# Altium PCB Main_PCB.PcbDoc
Units mm, origin at the board's own origin, x right, y up, seen from the top; angles counter-clockwise.
Board outline 60.07 x 70.36 mm, 2 copper layers (Top Layer, Bottom Layer); 21 components, 29 nets, 94 pads, 8 vias.
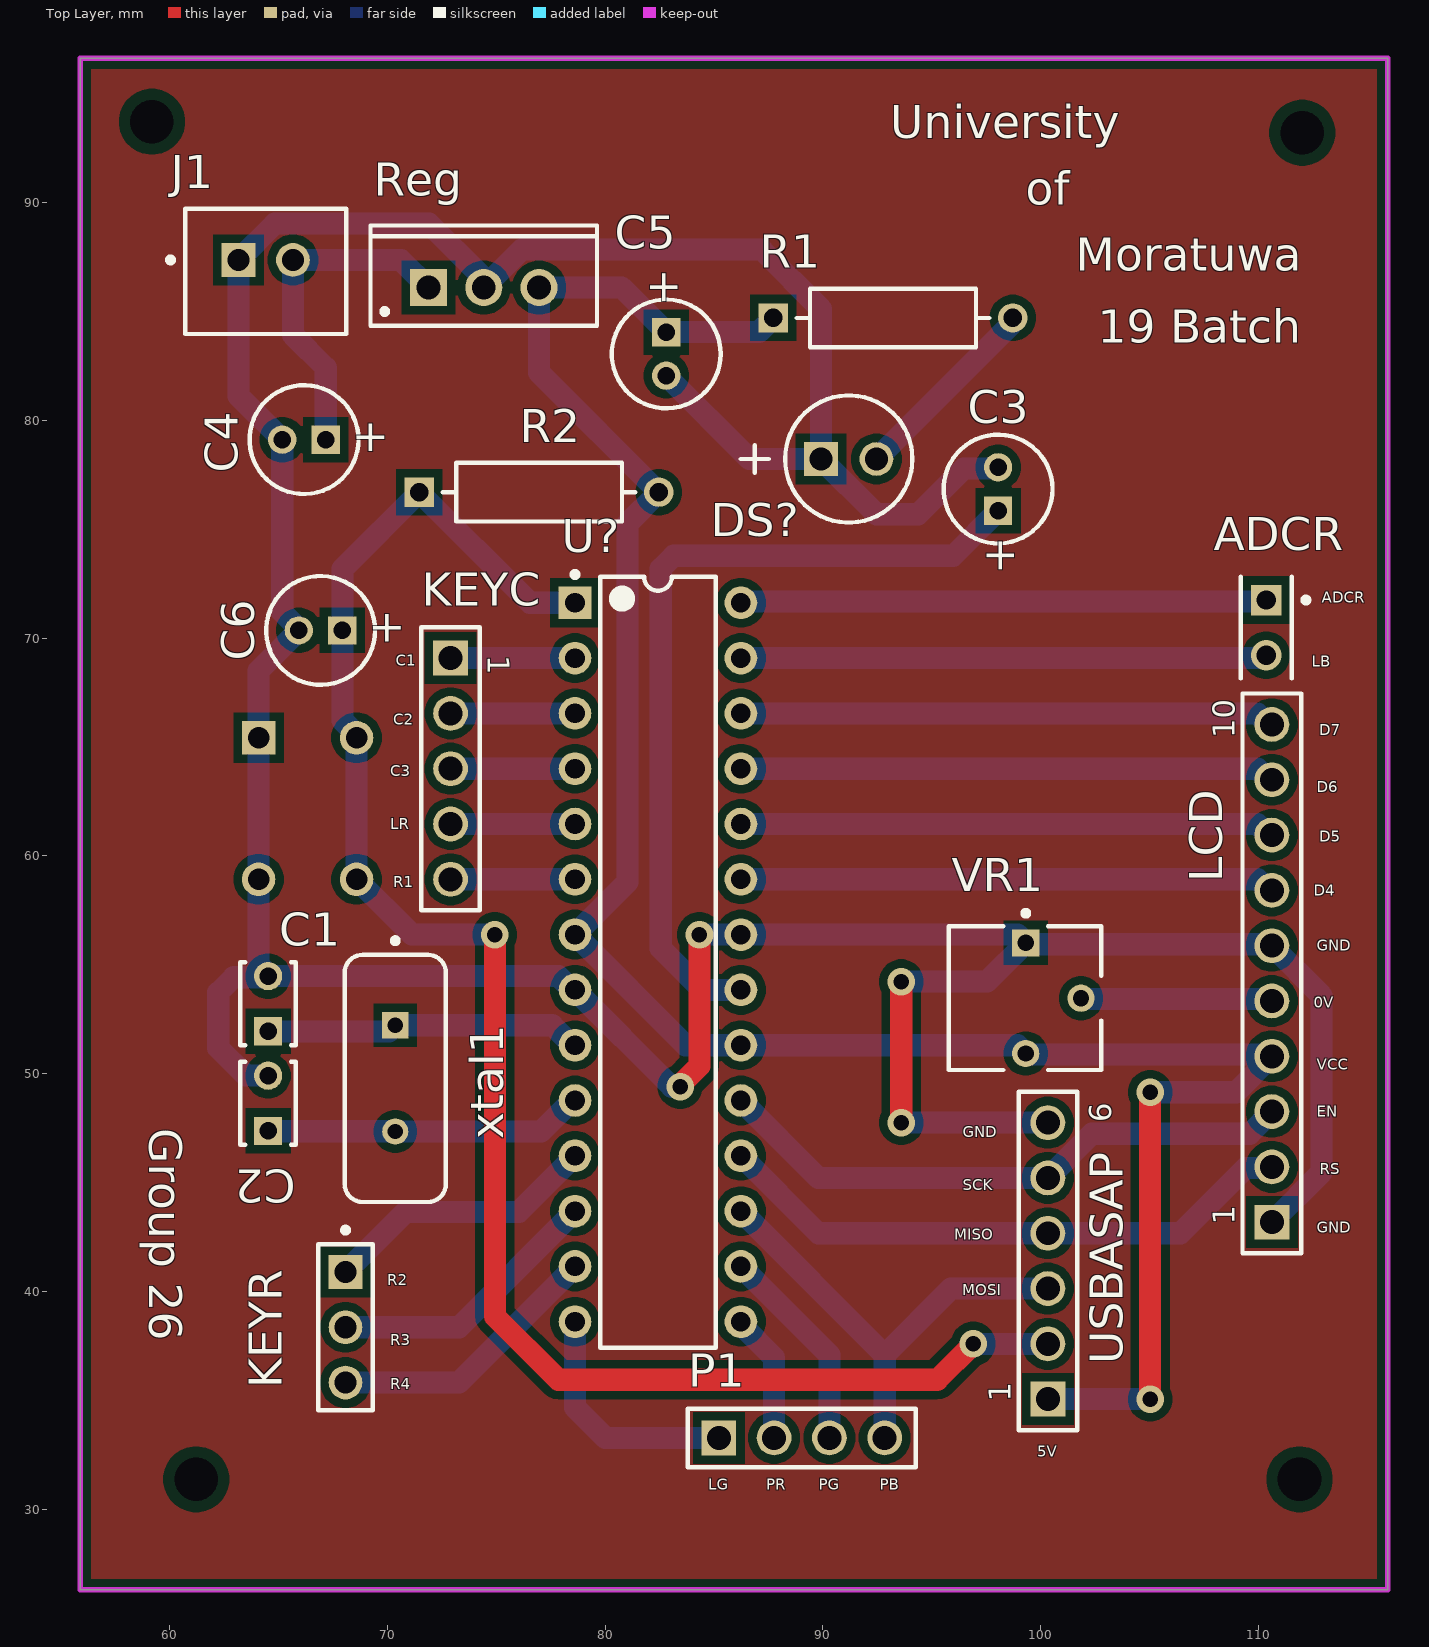
[diagram p0: Top Layer view]
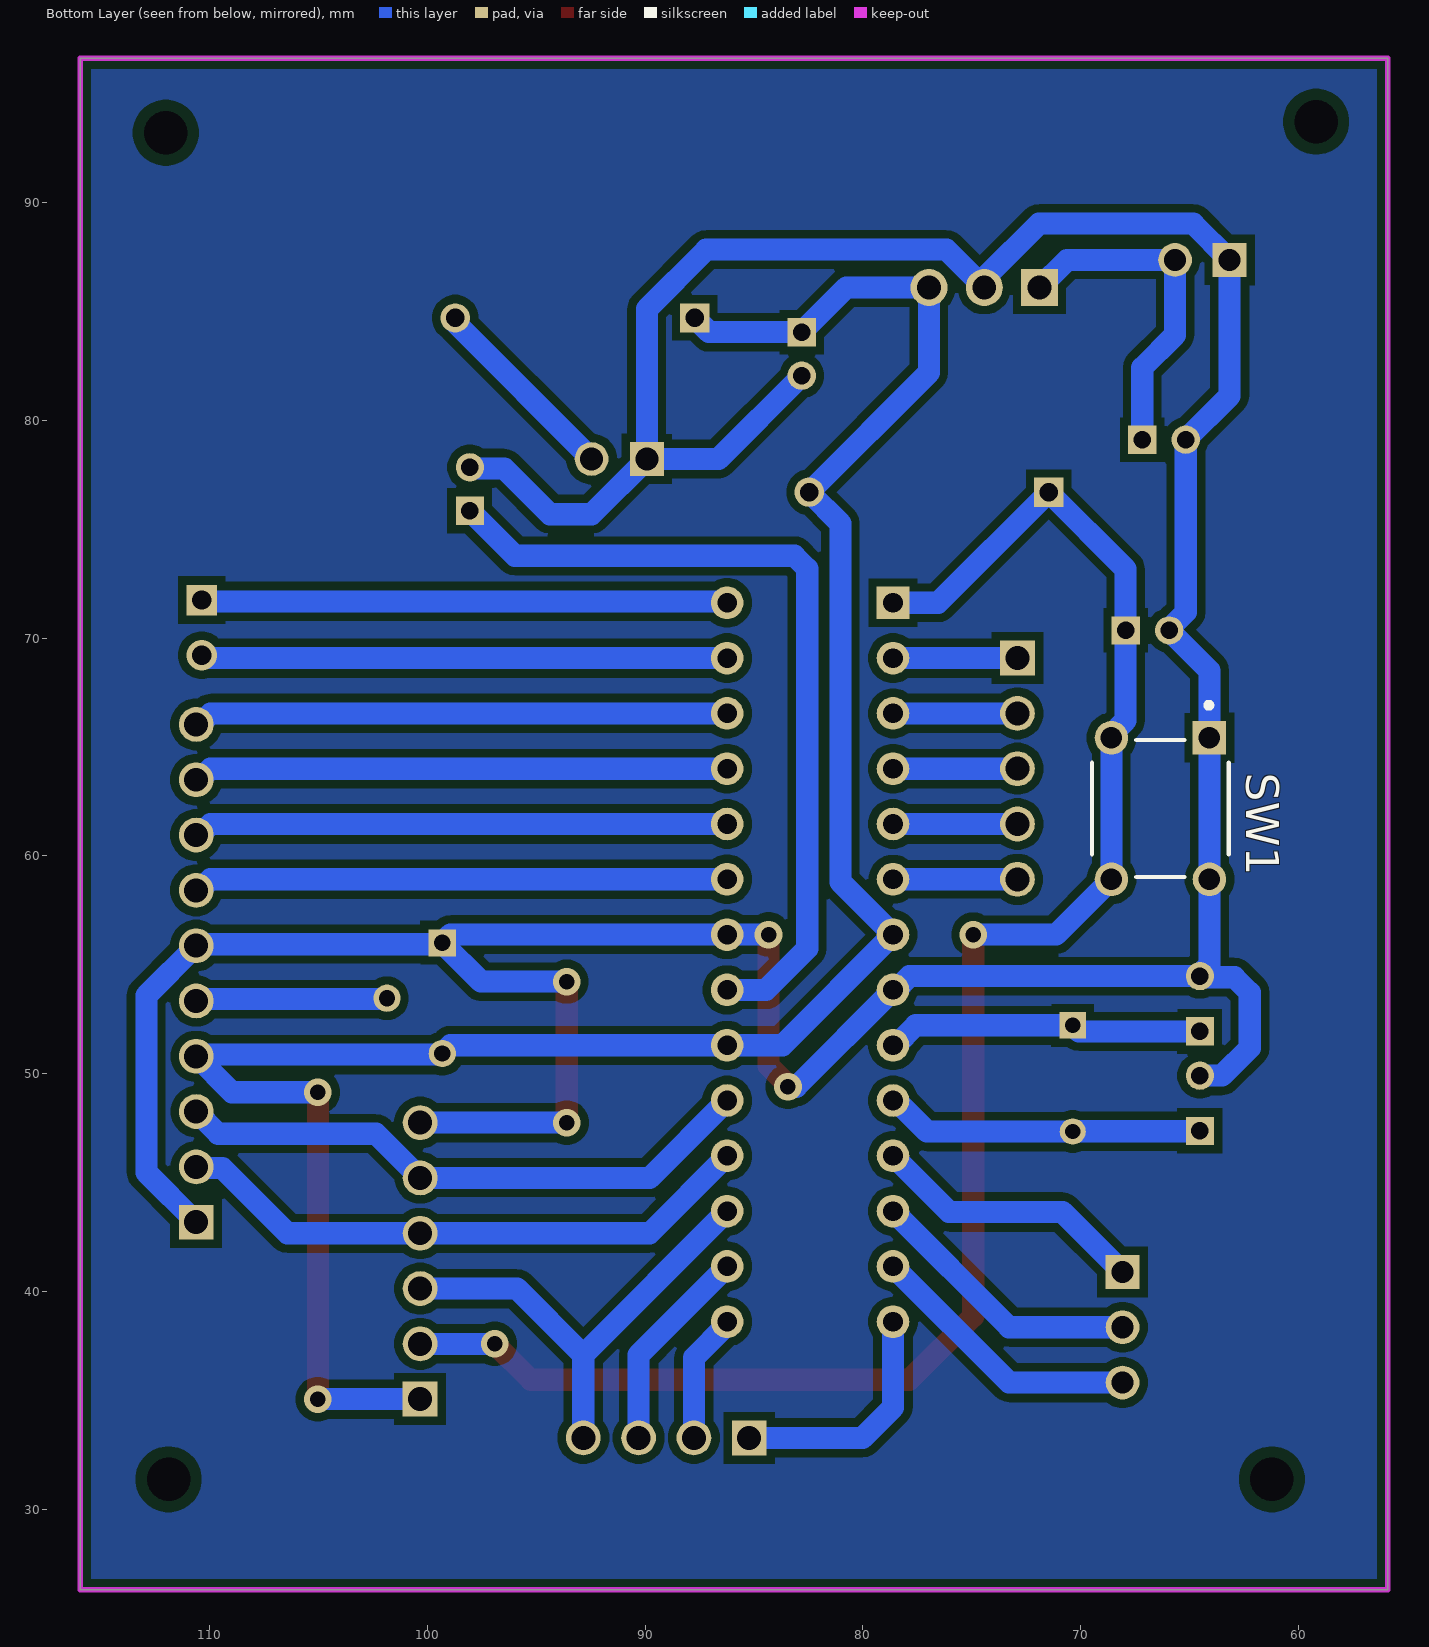
[diagram p1: Bottom Layer view, seen from below]

## Layer stack, top to bottom
Top Solder: solder mask 0.0102, Solder Resist, Dk 3.5
Top Layer: signal copper 0.0356
Dielectric 1: dielectric 0.32, FR-4, Dk 4.8
Bottom Layer: signal copper 0.0356
Bottom Solder: solder mask 0.0102, Solder Resist, Dk 3.5

## Board outline
55.88,26.289 115.951,26.289 115.951,96.647 55.88,96.647

## Design rules (kind name [scope] priority, off if disabled: settings)
Clearance [All] p1: gap=0.381 ignorepadtopadclearanceinfootprint=FALSE except(0.508: Arc-Hole Track-Hole SMDPad-Hole THPad-Hole Via-Hole Fill-Hole Poly-Hole Region-Hole Text-Hole)
PolygonConnect [All] p1: connectstyle=Relief reliefconductorwidth=0.254 reliefentries=4 polygonreliefangle="90 Angle" airgapwidth=0.254
RoutingVias [All] p1: holewidth=0.711 width=1.27 viastyle="Through Hole" minholewidth=0.711 minwidth=1.27 maxholewidth=0.711 maxwidth=1.27
SolderMaskExpansion [All] p1: expansion=0.102 istentingtop=FALSE
Width 1width1 [All] p1: maxlimit=1.016 minlimit=1.016 preferedwidth=1.016
30 further rules are at their usual default settings.

## Components (designator, comment, footprint, x,y, rotation, side; value= is the part's Value field where it differs from the comment)
ADCR "5-146280-2" TECO-5-146280-2_V 110.363,70.485 r270 top
C1 "22pF" KEMT-C315-THT-2 64.516,53.213 r90 top
C2 "22pF" KEMT-C315-THT-2 64.516,48.641 r90 top
C3 "100nF" CAPPR55-200-1100X500X1200 98.044,76.851 r90 top
C4 "330nF" CAPPR55-200-1100X500X1200 66.167,79.121 r180 top
C5 "100nF" CAPPR55-200-1100X500X1200 82.804,83.058 r270 top
C6 "100nF" CAPPR55-200-1100X500X1200 66.929,70.358 r180 top
DS? "HLMP-3301" AVAG-HLMP-3301-2 89.916,78.232 r0 top
J1 "power" FP-B2B-XH-A_LF_SN-MFG 64.409,86.851 r0 top
KEYC "61300511121" 61300511121 72.898,64.008 r270 top
KEYR "22-28-4033" MOLX-22-28-4033_V 68.072,38.354 r270 top
LCD "61301011121" 61301011121 110.617,54.61 r90 top
P1 "61300411121" 61300411121 89.027,33.274 r0 top
R1 "1 k" FP-RNC55-MFG 93.218,84.709 r0 top value=1kΩ
R2 "RNC55H1002FSB14" FP-RNC55-MFG 76.962,76.708 r0 top value=10kΩ
Reg "" TO220 74.422,86.106 r0 top
SW1 "" FP-3-1825910-1-MFG 66.33,62.178 r270 bottom
U? "ATmega328-PU" 28P3 82.423,55.118 r0 top
USBASAP "61300611121" 61300611121 100.33,41.402 r90 top
VR1 "3362P-1-103LF" BOUR-3362P 99.279,53.467 r270 top
xtal1 "FOXSLF/160-20" FOX-FOXSLF160-20 70.358,49.784 r270 top

## Footprints (in the part's own frame and the unit in brackets; to place one, negate y for a bottom-side part, rotate by r counter-clockwise, add the part's x,y. Pads: shape width x height; smd on the part's side, far side on the other; paste and mask are expansions set on the pad)
28P3 [mm] "28-Pin Plastic Dual In-Line Package (PDIP)"
  rect 1.5x1.5 hole 0.9: 1(-3.81,16.51)
  round 1.5 hole 0.9: 2(-3.81,13.97) 3(-3.81,11.43) 4(-3.81,8.89) 5(-3.81,6.35) 6(-3.81,3.81) 7(-3.81,1.27) 8(-3.81,-1.27) 9(-3.81,-3.81) 10(-3.81,-6.35) 11(-3.81,-8.89) 12(-3.81,-11.43) 13(-3.81,-13.97) 14(-3.81,-16.51) 15(3.81,-16.51) 16(3.81,-13.97) 17(3.81,-11.43) 18(3.81,-8.89) 19(3.81,-6.35) 20(3.81,-3.81) 21(3.81,-1.27) 22(3.81,1.27) 23(3.81,3.81) 24(3.81,6.35) 25(3.81,8.89) 26(3.81,11.43) 27(3.81,13.97) 28(3.81,16.51)
  silkscreen extent -3.93,-17.7 2.65,17.93, body extent -3.6,-17.65 3.6,17.65, height 4.58
61300411121 [mm] "Pin Header, pitch 2.54 mm, THT, Vertical, single row, 4p"
  rect 1.6x1.6 hole 1.1: 1(-3.81,0)
  round 1.6 hole 1.1: 2(-1.27,0) 3(1.27,0) 4(3.81,0)
  silkscreen extent -5.23,-1.35 5.23,1.35, body extent -5.08,-1.27 5.08,1.27, height 8.57
61300511121 [mm] "Pin Header, pitch 2.54 mm, THT, Vertical, single row, 5p"
  rect 1.6x1.6 hole 1.1: 1(-5.08,0)
  round 1.6 hole 1.1: 2(-2.54,0) 3(0,0) 4(2.54,0) 5(5.08,0)
  silkscreen extent -6.5,-1.35 6.5,1.35, body extent -6.35,-1.27 6.35,1.27, height 8.57
61300611121 [mm] "Pin Header, pitch 2.54 mm, THT, Vertical, single row, 6p"
  rect 1.6x1.6 hole 1.1: 1(-6.35,0)
  round 1.6 hole 1.1: 2(-3.81,0) 3(-1.27,0) 4(1.27,0) 5(3.81,0) 6(6.35,0)
  silkscreen extent -7.77,-1.35 7.77,1.35, body extent -7.62,-1.27 7.62,1.27, height 8.57
61301011121 [mm] "Pin Header, pitch 2.54 mm, THT, Vertical, single row, 10p"
  rect 1.6x1.6 hole 1.1: 1(-11.43,0)
  round 1.6 hole 1.1: 2(-8.89,0) 3(-6.35,0) 4(-3.81,0) 5(-1.27,0) 6(1.27,0) 7(3.81,0) 8(6.35,0) 9(8.89,0) 10(11.43,0)
  silkscreen extent -12.85,-1.35 12.85,1.35, body extent -12.7,-1.27 12.7,1.27, height 8.57
AVAG-HLMP-3301-2 [mm] "THD, 2-Leads, Body Dia 5.85mm"
  rect 1.55x1.55 hole 1.05: 1(0,0)
  round 1.55 hole 1.05: 2(2.54,0)
  silkscreen extent -3.68,-2.92 4.19,2.92
BOUR-3362P [mm] "THD, 3-Leads, Body 6.6x6.99mm, Pitch 2.54mm"
  rect 1.25x1.25 hole 0.75: 1(-2.54,0.035)
  round 1.25 hole 0.75: 2(0,2.575) 3(2.54,0.035)
  silkscreen extent -4.02,-3.49 3.3,3.5, body extent -3.3,-3.49 3.3,3.49, height 4.95
CAPPR55-200-1100X500X1200 [mm] "THD, 2-Leads, Dia 5mm, Body Length 11mm"
  rect 1.3x1.3 hole 0.8: 1(-1,0)
  round 1.3 hole 0.8: 2(1,0)
  silkscreen extent -2.5,-2.5 2.5,2.5, body extent -2.5,-2.5 2.5,2.5, height 12
FOX-FOXSLF160-20 [mm] "THD, 2-Leads, Body 11.35x4.65mm"
  rect 1.2x1.2 hole 0.7: 1(-2.44,0)
  round 1.2 hole 0.7: 2(2.44,0)
  silkscreen extent -6.45,-2.32 5.68,2.32, body extent -5.67,-2.32 5.68,2.33, height 3.6
FP-3-1825910-1-MFG [mm]
  rect 1.54x1.54 hole 0.99 paste-1000 mask+0: 1(-3.25,2.25)
  round 1.54 hole 0.99 paste-1000 mask+0: 2(3.25,2.25) 3(-3.25,-2.25) 4(3.25,-2.25)
  silkscreen extent -4.87,-3.15 3.15,3.15, body extent -3.9,-3 3.9,3, height 17.3
FP-B2B-XH-A_LF_SN-MFG [mm]
  rect 1.55x1.55 hole 1 paste-1000 mask+0: 1(-1.25,0.525)
  round 1.55 hole 1 paste-1000 mask+0: 2(1.25,0.525)
  silkscreen extent -4.5,-2.88 3.7,2.88, body extent -3.8,-2.98 3.8,2.98, height 0.25
FP-RNC55-MFG [mm]
  rect 1.35x1.35 hole 0.85 paste-1000 mask+0: 1(-5.5,0)
  round 1.35 hole 0.85 paste-1000 mask+0: 2(5.5,0)
  silkscreen extent -4.43,-1.35 4.43,1.35, body extent -6.27,-1.45 6.27,1.45, height 0.25
KEMT-C315-THT-2 [mm] "THD, 2-Leads, Body 3.81x2.54mm"
  rect 1.3x1.3 hole 0.8: 1(-1.27,0)
  round 1.3 hole 0.8: 2(1.27,0)
  silkscreen extent -1.91,-1.27 1.91,1.27, body extent -1.91,-1.27 1.91,1.27, height 4.66
MOLX-22-28-4033_V [mm] "THD, 3-Leads, Body 7.62x2.49mm, Pitch 2.54mm"
  rect 1.55x1.55 hole 1.02: 1(-2.54,0)
  round 1.55 hole 1.02: 2(0,0) 3(2.54,0)
  silkscreen extent -4.58,-1.24 3.81,1.24, body extent -3.81,-1.24 3.81,1.24, height 8.38
TECO-5-146280-2_V [mm] "Connector, 2-Leads, Body 4.67x2.34mm, Pitch 2.54mm"
  rect 1.4x1.4 hole 0.89: 1(-1.27,0)
  round 1.4 hole 0.89: 2(1.27,0)
  silkscreen extent -2.33,-1.17 2.33,1.94, body extent -2.34,-1.17 2.34,1.17, height 5.33
TO220 [mm] "TO, Thru-Hole, Vertical, Heatsink Mounted; 3 In-Line Leads; Pitch 2.54 mm"
  rect 1.7x1.7 hole 1.1: 1(-2.54,0)
  round 1.7 hole 1.1: 2(0,0) 3(2.54,0)
  silkscreen extent -5.2,-1.75 5.2,2.85, body extent -5.25,-1.8 5.25,2.9, height 19.7

## Part data
ADCR: library part CMP-2000-07492-1, "Male Header, Pitch 2.54 mm, 1 x 2 Position, Height 8.21 mm, Tail Length 3.05 mm, -65 to 105 degC, RoHS, Bulk", Case\/Package=100, Colour=Black, Current Rating=3A, Flammability Rating=UL94V-0, High Temperature Housing=Yes, Manufacturer="TE Connectivity", Max Current Rating=5A, Max Operating Temperature=105degC, Min Operating Temperature=-65degC, Package Description="Male Header, Pitch 2.54 mm, 1 x 2 Position, Height 8.21 mm, Tail Length 3.05 mm", Package Quantity=500, Approvals=CSA, Board Standoff=No(Without), Connector Type=Header, Contact Gender=Male, Contact Material=CopperAlloy, Contact Mating Length=0.23inch, Contact Plating=Matte, Contact Protection=No(Without), Contact Shape=Square, Datasheet URL=http://www.te.com/commerce/DocumentDelivery/DDEController?Action=showdoc&DocId=Customer+Drawing%7F146280%7FH1%7Fpdf%7FEnglish%7FENG_CD_146280_H1.pdf%7F5-146280-2, Datasheet Version="Rev. H1, 08/2016", Depth=2.34mm, Gasket=No(Without), High Speed Serial Data Connector=No, Housing Colour=Black, Housing Material=Polymer, Keyed=No, Length=4.67mm, Manufacturer URL=http://www.te.com/, Mating Alignment=No(Without), Mating Connector Lock=No(Without), Mating Post Length=0.23inch, Mount=ThroughHole, Mounting Technology=ThroughHole, Number of Contacts=2, Number of Positions=2, Number of Rows=1, Orientation=Straight, Package Reference=5-146280-2, Packaging=Carton, Panel Mount Retention=No(Without), PCB Mount Retention=Without, PCB Mounting Orientation=Vertical, PCB Thickness=0.063inch, Pitch=2.54mm, Radiation Hardening=No, RoHSCompliant=true, Row Spacing=2.54mm, Selectively Loaded=No(Without), Stabilizers=No(Without), Termination=ThroughHole, Termination Post Length=0.12inch
C1 C2: library part CMP-1664-00008-1, "Capacitor, Ceramic, 22 pF, +/-10 %, 100 V, -55 to 125 degC, 2-Pin THD, RoHS, Bulk", Case\Package=TO-220, Max Input Voltage="40 V", Max Operating Temperature="125 degC", Max Ouput Current="1.5 A", Min Input Voltage="4.2 V", Min Operating Temperature="0 degC", Output Voltage="1.2 V", Package Quantity=50, ComponentLink1Description="Manufacturer URL", ComponentLink1URL=http://www.kemet.com/, ComponentLink2Description=Datasheet, ComponentLink2URL=http://capacitoredge.kemet.com/capedge2/DataSheet/Datasheet-C315C220K1G5TA.pdf?pn=C315C220K1G5TA{BULK}, DatasheetVersion=Aug-16, Height="9.28 mm", Length="10.28 mm", Mount="Through Hole", Output Current="1.5 A", Outputs=1, PackageDescription="2-Pin Through Hole Device, Body 3.81 x 2.54 mm", PackageReference=C315-THT-2, Packaging=Rail/Tube, Pins=3, Radiation Hardening=No, REACH SVHC="No SVHC", RoHSCompliant=true, Weight="0.08113 oz", Width="4.82 mm"
C3 C4 C5 C6: library part CMP-1665-00039-1, "Aluminum Electrolytic Capacitor, 1 uF, +/- 20%, 50 V, -55 to 105 degC, 2-Pin THD, RoHS, Bulk", Max Operating Temperature="70 degC", Min Operating Temperature="-30 degC", Package Quantity=150, Channels=2, ComponentLink1Description="Manufacturer URL", ComponentLink1URL=http://www.panasonic.com/, ComponentLink2Description=Datasheet, ComponentLink2URL=https://datasheet.ciiva.com/7275/94060-7275472.pdf, DatasheetVersion=Mar-05, Mount="Through Hole", PackageDescription="2-Pin Radial Lead, Dia 5 mm, Body Length 11 mm", PackageReference=CAPPR55-200-1100X500X1200, Packaging=Bulk, Radiation Hardening=No, RoHSCompliant=true
DS?: library part CMP-2000-06411-1, "T-1 3/4 (5 mm) Diffused LED Lamp, 1.9 V, -40 to 100 degC, 2-Pin THD, RoHS, Bulk", Emitting Color=Red, Forward Current=25mA, Forward Voltage=2.4V, Manufacturer=Avago, Operating Temp Range=-40Cto100C, Operating Temperature Classification=Industrial, Package Description="2-Pin Through Hole LED, Dia 5.85 mm", Package Type=T-13/4, Power Dissipation=85W, Reverse Voltage=5V, Test Current (It)=10mA, Chip Material=GaP, Datasheet URL=http://www.avagotech.com/docs/AV02-1558EN, Datasheet Version=03/2015, DELETED=Compliant, Dominant Wave Length=626nm, High Brightness=No, Lens Dimensions=5.08x5.08x8.3mm, Lens Type=ColoredDiffused, Lum Intensity=5.4mcd, Luminous Intensity=5.4mcd, Main Category=StandardLED, Manufacturer URL=http://www.avagotech.com/, Mounting=ThroughHole, Mounting Technology=ThroughHole, Number of  Elements=1, Package Reference=HLMP-3301, Packaging=TapeandReel, Peak Wavelength=635nm, Pin Count=2, Product Depth (mm)=6.1mm, Product Height (mm)=9.19mm, Product Length (mm)=6.1mm, Rad Hardened=No, Shape Type=Circular, Type=Uni-Color, Viewing Angle=60deg
J1: library part CMP-2000-05888-3, "CONN HEADER VERT 2POS 2.5MM", Color=Natural, Contact Resistance=20mR, Current Rating=3A, Housing Color=White, Insulation Resistance=1GR, Max Operating Temperature=85°C, Max Voltage Rating (AC)=250V, Min Operating Temperature=-25°C, Connector Type="Male Pin", Contact Material=Brass, Contact Plating=Tin, Contact Type="Male Pin", Depth=5.75mm, Fastening Type=Detent, Housing Material=Polyamide, Lead Free="Lead Free", Lead Pitch=2.5mm, Length=7.4mm, Max Current Rating=3A, Max Voltage Rating (DC)=250V, Mount="Through Hole", Number of Contacts=2, Number of Positions=2, Number of Rows=1, Orientation=Straight, Packaging=Bulk, Pitch=2.5mm, REACH SVHC="No SVHC", Series=XH, Termination=Solder, Voltage Rating=250V, Voltage Rating (AC)=250V, Wire/Cable Gauge=22AWG
KEYC: library part CMP-1502-01068-1, "THT Vertical Pin Header WR-PHD, Pitch 2.54 mm, Single Row, 5 pins", Contact Resistance=20mOhm, Manufacturer="Wurth Elektronik", Operating Temperature=-40to105degC, Rated Current=3A, Withstanding Voltage=500VAC, Working Voltage=250VAC, Datasheet URL=https://katalog.we-online.de/em/datasheet/6130xx11121.pdf, Gender=Male, Manufacturer URL=http://www.we-online.de, Mounting Technology=THT, Orientation=Vertical, Package Reference=61300511121, Packaging=Bag, Part Number=61300511121, Pin Number=5, Pitch=2.54mm, Publisher=WurthElektronik, Row Number=Single
KEYR: library part CMP-1676-00001-5, "Male Header, Pitch 2.54 mm, 1 x 3 Position, Height 8.38 mm, Tail Length 3.18 mm, RoHS, Bulk", Colour=Black, Current Rating="4 A", Manufacturer=Molex, Max Operating Temperature="75 degC", Min Operating Temperature="0 degC", Package Quantity=1, Voltage Rating="250 V", ComponentLink1Description="Manufacturer URL", ComponentLink1URL=http://www.molex.com/, ComponentLink2Description=Datasheet, ComponentLink2URL=http://www.molex.com/pdm_docs/sd/022284033_sd.pdf, Contact Finish=Gold, Contact Material=Brass, Contact Plating=Gold, DatasheetVersion="Rev. G, 01/2012", Height="8.38 mm", Lead Pitch="0.1 inch", Length="7.62 mm", Mount="Through Hole", Mounting Technology="Through Hole", PackageDescription="Male Header, Pitch 2.54 mm, 1 x 3 Position, Height 8.38 mm, Tail Length 3.18 mm", PackageReference=22-28-4033, Packaging=Bulk, Pins=3, REACH SVHC=Unknown, RoHSCompliant=true, Rows=1
LCD: library part CMP-1502-01082-1, "THT Vertical Pin Header WR-PHD, Pitch 2.54 mm, Single Row, 10 pins", Contact Resistance=20mOhm, Manufacturer="Wurth Elektronik", Operating Temperature=-40to105degC, Rated Current=3A, Withstanding Voltage=500VAC, Working Voltage=250VAC, Datasheet URL=https://katalog.we-online.de/em/datasheet/6130xx11121.pdf, Gender=Male, Manufacturer URL=http://www.we-online.de, Mounting Technology=THT, Orientation=Vertical, Package Reference=61301011121, Packaging=Bag, Part Number=61301011121, Pin Number=10, Pitch=2.54mm, Publisher=WurthElektronik, Row Number=Single
P1: library part CMP-1502-01064-1, "THT Vertical Pin Header WR-PHD, Pitch 2.54 mm, Single Row, 4 pins", Contact Resistance=20mOhm, Manufacturer="Wurth Elektronik", Operating Temperature=-40to105degC, Rated Current=3A, Withstanding Voltage=500VAC, Working Voltage=250VAC, Datasheet URL=https://katalog.we-online.de/em/datasheet/6130xx11121.pdf, Gender=Male, Manufacturer URL=http://www.we-online.de, Mounting Technology=THT, Orientation=Vertical, Package Reference=61300411121, Packaging=Bag, Part Number=61300411121, Pin Number=4, Pitch=2.54mm, Publisher=WurthElektronik, Row Number=Single
R1: library part CMP-02408-000004-1, "RES 10K OHM 1/8W 1% AXIAL", Manufacturer=Vishay, Manufacturer Part Number=RNC55H1002FSB14, Package=RNC55, Power Rating=0.125W, Resistance=1kΩ, Temperature="-65°C to +175°C", Temperature Coefficient=50ppm/°C, Temperature Range High=+175°C, Temperature Range Low=-65°C, Tolerance=1%, Voltage Rating=200V, Automotive=No, Category=Res, ComponentLink2Description=Datasheet, ComponentLink2URL=https://www.vishay.com/docs/31025/erc.pdf, Composition="Metal Film", Device Class L1="Passive Components", Device Class L2=Resistors, Device Class L3="Through-Hole Resistors", Digikey Description="RES 10K OHM 1/8W 1% AXIAL", Failure Rate=0.001%, Height=2.69mm, Ipc Land Pattern Name=RESAD1100W85L762D269, Lead Free=No, Military Standard=true, Octopart=https://octopart.com/rnc55h1002fs-vishay-40848808, RoHS=FALSE, Series=RNC
R2: library part CMP-02408-000004-1, "RES 10K OHM 1/8W 1% AXIAL", Manufacturer=Vishay, Package=RNC55, Power Rating=0.125W, Resistance=10kΩ, Temperature="-65°C to +175°C", Temperature Coefficient=50ppm/°C, Temperature Range High=+175°C, Temperature Range Low=-65°C, Tolerance=1%, Voltage Rating=200V, Automotive=No, Category=Res, ComponentLink2Description=Datasheet, ComponentLink2URL=https://www.vishay.com/docs/31025/erc.pdf, Composition="Metal Film", Device Class L1="Passive Components", Device Class L2=Resistors, Device Class L3="Through-Hole Resistors", Digikey Description="RES 10K OHM 1/8W 1% AXIAL", Failure Rate=0.001%, Height=2.69mm, Ipc Land Pattern Name=RESAD1100W85L762D269, Lead Free=No, Manufacturer Part Number=RNC55H1002FSB14, Military Standard=true, Octopart=https://octopart.com/rnc55h1002fs-vishay-40848808, RoHS=FALSE, Series=RNC
Reg: library part CMP-0244-00483-1, "Positive Voltage Regulator, 5V, 3-Pin TO-220", ComponentLink1Description="Manufacturer URL", ComponentLink1URL=http://www.st.com, ComponentLink2Description=Datasheet, ComponentLink2URL=http://www.st.com/internet/com/TECHNICAL_RESOURCES/TECHNICAL_LITERATURE/DATASHEET/CD00000444.pdf, ComponentLink3Description="Package Specification", ComponentLink3URL=http://www.st.com/internet/com/TECHNICAL_RESOURCES/TECHNICAL_LITERATURE/PACKAGE_INFORMATION/CD00004649.pdf, DatasheetVersion=16/11/2011, PackageDescription="TO, Thru-Hole, Vertical, Heatsink Mounted; 3 In-Line Leads; Pitch 2.54 mm", PackageReference=TO220, PackageVersion=ver3.0
SW1: library part CMP-03407-000001-1, "SWITCH TACTILE SPST-NO 0.05A 24V", Contact Current Rating=50mA, Contact Resistance=100mΩ, Manufacturer="TE Connectivity", Manufacturer Part Number=3-1825910-1, Operating Force=160gf, Package=0, Temperature="-35°C to +85°C", Temperature Range High=+85°C, Temperature Range Low=-35°C, Automotive=No, Category=Switch, ComponentLink2Description=Datasheet, ComponentLink2URL=https://www.te.com/commerce/DocumentDelivery/DDEController?Action=srchrtrv&DocNm=1825910&DocType=Customer+Drawing&DocLang=English, Device Class L1=Electromechanical, Device Class L2=Switches, Device Class L3="Tactile Switches", Digikey Description="SWITCH TACTILE SPST-NO 0.05A 24V", Electromechanical Life=100000Cycles, Height=17.3mm, Lead Free=Yes, Mount="Through Hole", Octopart=https://octopart.com/3-1825910-1-te+connectivity-46506874, RoHS=TRUE, Throw Configuration=SPST-NO
U?: library part CMP-0095-00015-2, "8-bit AVR Microcontroller, 32KB Flash, 1KB EEPROM, 2KB SRAM, 28-pin PDIP, Industrial Grade (-40°C to 85°C)", ComponentLink1Description="Manufacturer URL", ComponentLink1URL=http://www.atmel.com/, ComponentLink2Description="ATmega48A/48PA/88A/88PA/168A/168PA/328/328P Datasheet", ComponentLink2URL=http://www.atmel.com/dyn/resources/prod_documents/8271.pdf, ComponentLink3Description="ATmega48A/48PA/88A/88PA/168A/168PA/328/328P Summary", ComponentLink3URL=http://www.atmel.com/dyn/resources/prod_documents/8271S.pdf, DatasheetVersion="revD, May-2011", PackageDescription="28-lead (0.300\"/7.62mm Wide) Plastic Dual Inline Package (PDIP)", PackageReference=28P3, PackageVersion="revB, Sep-2001", RevisionNote="DatasheetVersion updated. URLs added."
USBASAP: library part CMP-1502-01070-1, "THT Vertical Pin Header WR-PHD, Pitch 2.54 mm, Single Row, 6 pins", Contact Resistance=20mOhm, Manufacturer="Wurth Elektronik", Operating Temperature=-40to105degC, Rated Current=3A, Withstanding Voltage=500VAC, Working Voltage=250VAC, Datasheet URL=https://katalog.we-online.de/em/datasheet/6130xx11121.pdf, Gender=Male, Manufacturer URL=http://www.we-online.de, Mounting Technology=THT, Orientation=Vertical, Package Reference=61300611121, Packaging=Bag, Part Number=61300611121, Pin Number=6, Pitch=2.54mm, Publisher=WurthElektronik, Row Number=Single
VR1: library part CMP-1747-00004-1, "Square Trimpot(R) Trimming Potentiometer, 10 KOhm, 300 V, -55 to 125 degC, 3-Pin THD, RoHS, Tube", Case Code (Imperial)=0612, Case Code (Metric)=1632, Case/Package=1206, Max Operating Temperature=125degC, Min Operating Temperature=-25degC, Package Quantity=5000, Power Rating="1 W", Resistance="50 mohm", Tolerance=1%, Voltage Rating="220 mV", ComponentLink1Description="Manufacturer URL", ComponentLink1URL=http://www.bourns.com/, ComponentLink2Description=Datasheet, ComponentLink2URL=http://www.bourns.com/docs/Product-Datasheets/3362.pdf, DatasheetVersion=May-16, Height="0.6 mm", Length="3.2 mm", Mount="Surface Mount", PackageDescription="3-Pin Through Hole Device, Body 6.6 x 6.99 mm, Pitch 2.54 mm", PackageReference=3326P, Packaging="Tape and Reel", Pins=2, REACH SVHC="No SVHC", RoHSCompliant=True, Width="1.6 mm"
xtal1: library part CMP-1749-00003-1, "Resistance Weld Thru-Hole Crystal, 16 MHz, -20 to 70 degC, 2-Pin THD, RoHS, Bulk", Case\Package=Axial, Max Operating Temperature="155 degC", Min Operating Temperature="-55 degC", Package Quantity=200, Power Rating="250 mW", Resistance="221 kohm", Tolerance=1%, Voltage Rating="250 V", ComponentLink1Description="Manufacturer URL", ComponentLink1URL=http://www.foxonline.com/, ComponentLink2Description=Datasheet, ComponentLink2URL=http://www.foxonline.com/pdfs/hc49slf.pdf, DatasheetVersion=Mar-15, Length="0.248 inch", Mount="Through Hole", PackageDescription="2-Pin Through Hole Device, Body 11.35 x 4.65 mm", PackageReference=FOXSLF160-20, Packaging=Bulk, RoHSCompliant=true

## Free pads (board coordinates)
  round 1.524 hole 2: 1(112.014,93.218) 2(59.182,93.726) 3(61.214,31.369) 4(111.887,31.369)

## Via types
v1: diameter 1.27, hole 0.711, Top Layer to Bottom Layer, 8 vias

## Nets (pads, with @x,y where several pads share a name; then routed paths per layer and width w, separated by ;. In a path a pad name is that pad's centre, name@x,y a point inside that pad or via, vN(x,y) a via of type N, cw(c..) or ccw(c..) an arc to the next point about the centre after c; other vN are vias at no path point)
+5: C5.1 LCD.4 R1.1 R2.2 Reg.3 U?.7 U?.20 USBASAP.1 VR1.3 | length 104.9
  Top Layer w1.016: v1(105.029,35.052) v1(105.029,49.149)
  Bottom Layer w1.016: R1.1 87.067,84.058 C5.1 80.756,86.106 Reg.3 76.962,82.208 R2.2 81.026,75.272 81.026,58.801 U?.7 83.693,51.308 U?.20 98.933,51.308 VR1.3 99.359,50.882 110.535,50.882 LCD.4 108.966,49.149 v1(105.029,49.149) ; USBASAP.1 v1(105.029,35.052)
GND: C1.2 C2.2 C3.2 C4.2 C5.2 C6.2 DS?.1 J1.1 LCD.1 LCD.6 Reg.2 SW1.1 SW1.2 U?.8 U?.22 USBASAP.6 VR1.1 | length 188.5
  Top Layer w1.016: v1(83.439,49.403) 83.439,49.472 84.328,50.361 v1(84.328,56.388) ; v1(93.599,47.752) v1(93.599,54.229)
  Bottom Layer w1.016: C2.2 63.5,49.911 62.23,51.181 62.23,53.721 62.938,54.429 64.462,54.429 C1.2 ; C5.2 86.63,78.232 DS?.1 ; v1(83.439,49.403) 83.058,49.403 U?.8 78.482,53.848 77.847,54.483 C1.2 ; v1(84.328,56.388) U?.22 98.933,56.388 VR1.1 ; v1(93.599,47.752) USBASAP.6 ; v1(93.599,54.229) 97.536,54.229 VR1.1 ; C3.2 97.99,77.797 96.466,77.797 94.361,75.692 92.456,75.692 DS?.1 ; LCD.1 112.903,45.466 112.903,53.594 LCD.6 110.553,55.944 99.377,55.944 VR1.1 ; C1.2 64.516,54.56 64.08,54.996 SW1.2 SW1.1 64.08,68.509 C6.2 65.929,70.435 65.167,71.197 C4.2 63.159,81.129 J1.1 64.823,89.04 71.905,89.04 74.291,86.654 74.291,86.237 Reg.2 76.161,87.845 87.189,87.845 89.916,85.118 DS?.1
NetADCR_1: ADCR.1 U?.28 | length 24.2
  Bottom Layer w1.016: U?.28 86.296,71.691 110.299,71.691 ADCR.1
NetADCR_2: ADCR.2 U?.27 | length 24.2
  Bottom Layer w1.016: U?.27 110.132,69.088 110.259,69.215 ADCR.2
NetC1_1: C1.1 U?.9 xtal1.1 | length 14.6
  Bottom Layer w1.016: C1.1 70.077,51.943 xtal1.1 77.566,52.224 78.482,51.308 U?.9
NetC2_1: C2.1 U?.10 xtal1.2 | length 14.7
  Bottom Layer w1.016: C2.1 64.53,47.357 70.344,47.357 xtal1.2 77.058,47.344 78.482,48.768 U?.10
NetC3_1: C3.1 U?.21 | length 38.5
  Bottom Layer w1.016: U?.21 84.455,53.848 82.55,55.753 82.55,73.192 83.145,73.787 95.98,73.787 C3.1
NetC6_1: C6.1 R2.1 SW1.3 SW1.4 U?.1 USBASAP.2 | length 81
  Top Layer w1.016: v1(74.93,56.388) 74.93,38.862 77.851,35.941 95.25,35.941 v1(96.901,37.592)
  Bottom Layer w1.016: v1(74.93,56.388) 71.12,56.388 SW1.4 SW1.3 68.58,65.57 67.929,66.221 C6.1 67.929,73.175 R2.1 76.542,71.628 U?.1 ; v1(96.901,37.592) USBASAP.2
NetDS?_2: DS?.2 R1.2 | length 9.1
  Bottom Layer w1.016: DS?.2 98.654,84.43 98.654,84.645 R1.2
NetKEYC_1: KEYC.1 U?.2 | length 5.7
  Bottom Layer w1.016: KEYC.1 U?.2
NetKEYC_2: KEYC.2 U?.3 | length 5.7
  Bottom Layer w1.016: KEYC.2 U?.3
NetKEYC_3: KEYC.3 U?.4 | length 5.7
  Bottom Layer w1.016: KEYC.3 U?.4
NetKEYC_4: KEYC.4 U?.5 | length 5.7
  Bottom Layer w1.016: KEYC.4 U?.5
NetKEYC_5: KEYC.5 U?.6 | length 5.7
  Bottom Layer w1.016: KEYC.5 U?.6
NetKEYR_1: KEYR.1 U?.11 | length 12.8
  Bottom Layer w1.016: KEYR.1 70.826,43.648 76.033,43.648 U?.11
NetKEYR_2: KEYR.2 U?.12 | length 12.8
  Bottom Layer w1.016: KEYR.2 73.279,38.354 U?.12
NetKEYR_3: KEYR.3 U?.13 | length 12.8
  Bottom Layer w1.016: KEYR.3 73.279,35.814 U?.13
NetLCD_2: LCD.2 U?.18 USBASAP.4 | length 27.1
  Bottom Layer w1.016: U?.18 89.789,42.672 USBASAP.4 106.426,42.672 109.418,45.664 110.561,45.664 LCD.2
NetLCD_3: LCD.3 U?.19 USBASAP.5 | length 27.1
  Bottom Layer w1.016: U?.19 89.789,45.212 USBASAP.5 102.362,47.244 109.601,47.244 LCD.3
NetLCD_5: LCD.5 VR1.2 | length 8.8
  Bottom Layer w1.016: VR1.2 101.899,53.422 110.535,53.422 LCD.5
NetLCD_7: LCD.7 U?.23 | length 24.6
  Bottom Layer w1.016: U?.23 109.951,58.928 110.459,58.42 LCD.7
NetLCD_8: LCD.8 U?.24 | length 24.6
  Bottom Layer w1.016: U?.24 109.951,61.468 110.459,60.96 LCD.8
NetLCD_9: LCD.9 U?.25 | length 24.6
  Bottom Layer w1.016: U?.25 109.951,64.008 110.459,63.5 LCD.9
NetLCD_10: LCD.10 U?.26 | length 24.6
  Bottom Layer w1.016: U?.26 109.951,66.548 110.459,66.04 LCD.10
NetP1_1: P1.1 U?.14 | length 11.1
  Bottom Layer w1.016: U?.14 78.613,34.671 80.01,33.274 P1.1
NetP1_2: P1.2 U?.15 | length 6
  Bottom Layer w1.016: U?.15 86.233,38.477 87.757,36.953 P1.2
NetP1_3: P1.3 U?.16 | length 9.6
  Bottom Layer w1.016: U?.16 90.297,37.084 P1.3
NetP1_4: P1.4 U?.17 USBASAP.3 | length 21.9
  Bottom Layer w1.016: U?.17 92.837,37.084 ; P1.4 92.837,37.084 ; USBASAP.3 95.885,40.132 92.837,37.084
VCC: C4.1 J1.2 Reg.1 | length 15.6
  Bottom Layer w1.016: C4.1 67.167,82.422 65.659,83.93 J1.2 70.612,87.376 Reg.1

## Polygon pours and split planes (outlines as drawn)
no net on Top Layer "NONET_L01_P000" (solid, pour order 0): 56.007,96.52 115.824,96.52 115.824,26.416 56.007,26.416
no net on Bottom Layer "NONET_L02_P001" (solid, pour order 1): 56.007,96.52 115.824,96.52 115.824,26.416 56.007,26.416

## Keep-outs
Keep-Out Layer:
  the board outline again, w0.254

## Silkscreen, mask and mechanical layers (free items; w line width, h text height)
Top Overlay:
  text "University" at 93.091,92.964 h1.52
  text "of" at 99.314,89.916 h1.52
  text "Moratuwa" at 101.6,86.868 h1.52
  text "19 Batch" at 102.616,83.566 h1.52
  text "ADCR" at 112.903,71.628 h0.5
  text "C1" at 70.381,68.73 h0.5
  text "LB" at 112.458,68.701 h0.5
  text "C2" at 70.254,66.022 h0.5
  text "D7" at 112.799,65.555 h0.5
  text "C3" at 70.127,63.65 h0.5
  text "D6" at 112.672,62.925 h0.5
  text "LR" at 70.127,61.237 h0.5
  text "D5" at 112.799,60.654 h0.5
  text "R1" at 70.254,58.57 h0.5
  text "D4" at 112.545,58.181 h0.5
  text "GND" at 112.672,55.649 h0.5
  text "0V" at 112.545,53.034 h0.5
  text "VCC" at 112.672,50.188 h0.5
  text "EN" at 112.672,48.029 h0.5
  text "Group 26" at 59.055,47.498 h1.52 r270
  text "GND" at 96.416,47.089 h0.5
  text "RS" at 112.821,45.384 h0.5
  text "SCK" at 96.416,44.637 h0.5
  text "GND" at 112.672,42.695 h0.5
  text "MISO" at 96.035,42.366 h0.5
  text "R2" at 70,40.282 h0.5
  text "MOSI" at 96.406,39.826 h0.5
  text "R3" at 70.127,37.517 h0.5
  text "R4" at 70.127,35.518 h0.5
  text "5V" at 99.845,32.408 h0.5
  text "LG" at 84.732,30.884 h0.5
  text "PR" at 87.399,30.884 h0.5
  text "PG" at 89.812,30.884 h0.5
  text "PB" at 92.606,30.884 h0.5

## Text inside footprints (layer, text, board x,y; h text height)
C3: Top Overlay "+" at 98.781,72.943 h1.5 r90
C4: Top Overlay "+" at 70.075,79.858 h1.5 r180
C5: Top Overlay "+" at 82.067,86.966 h1.5 r270
C6: Top Overlay "+" at 70.837,71.095 h1.5 r180
KEYC: Top Overlay "1" at 74.598,69.208 h1.02 r270
LCD: Top Overlay "10" at 108.917,65.41 h1.02 r90; Top Overlay "1" at 108.917,43.06 h1.02 r90
USBASAP: Top Overlay "1" at 98.63,34.932 h1.02 r90; Top Overlay "6" at 103.251,47.778 h1.02 r90